# Altium PCB PCB1.PcbDoc (part 1 of 3)
Units mm, origin at the board's own origin, x right, y up, seen from the top; angles counter-clockwise.
Board outline 200 x 55 mm, 4 copper layers (Top Layer, Layer 1, Layer 2, Bottom Layer), stack 1.714 mm thick; 312 components, 230 nets, 1114 pads, 714 vias.
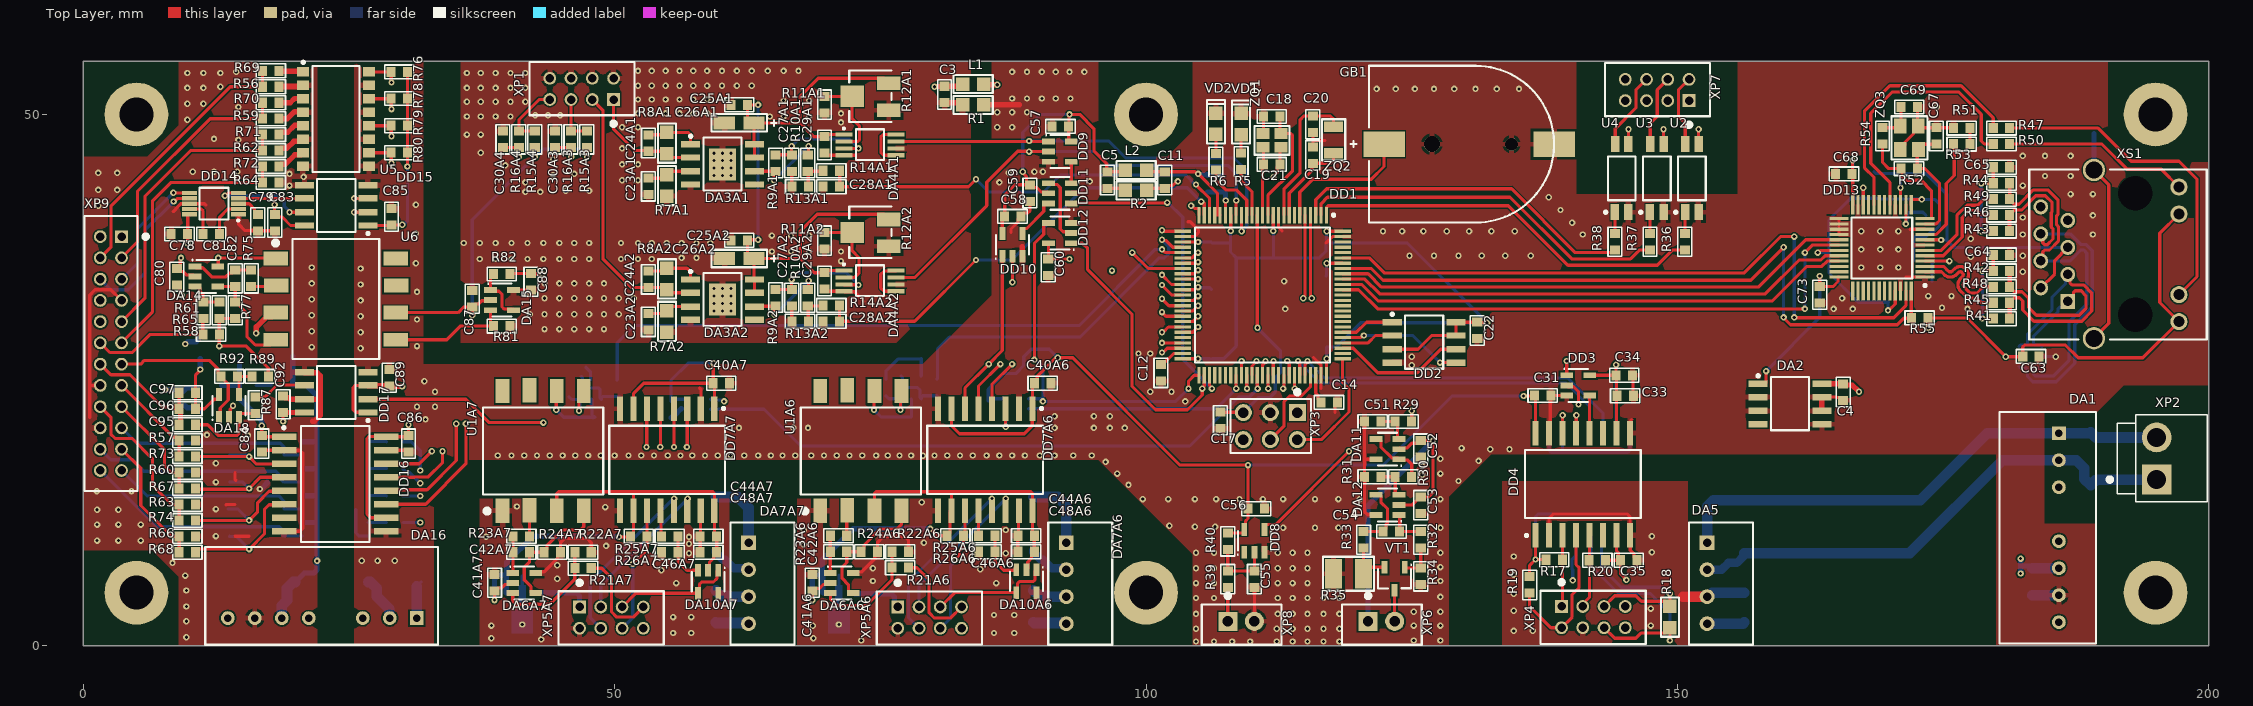
[diagram p0: Top Layer view]
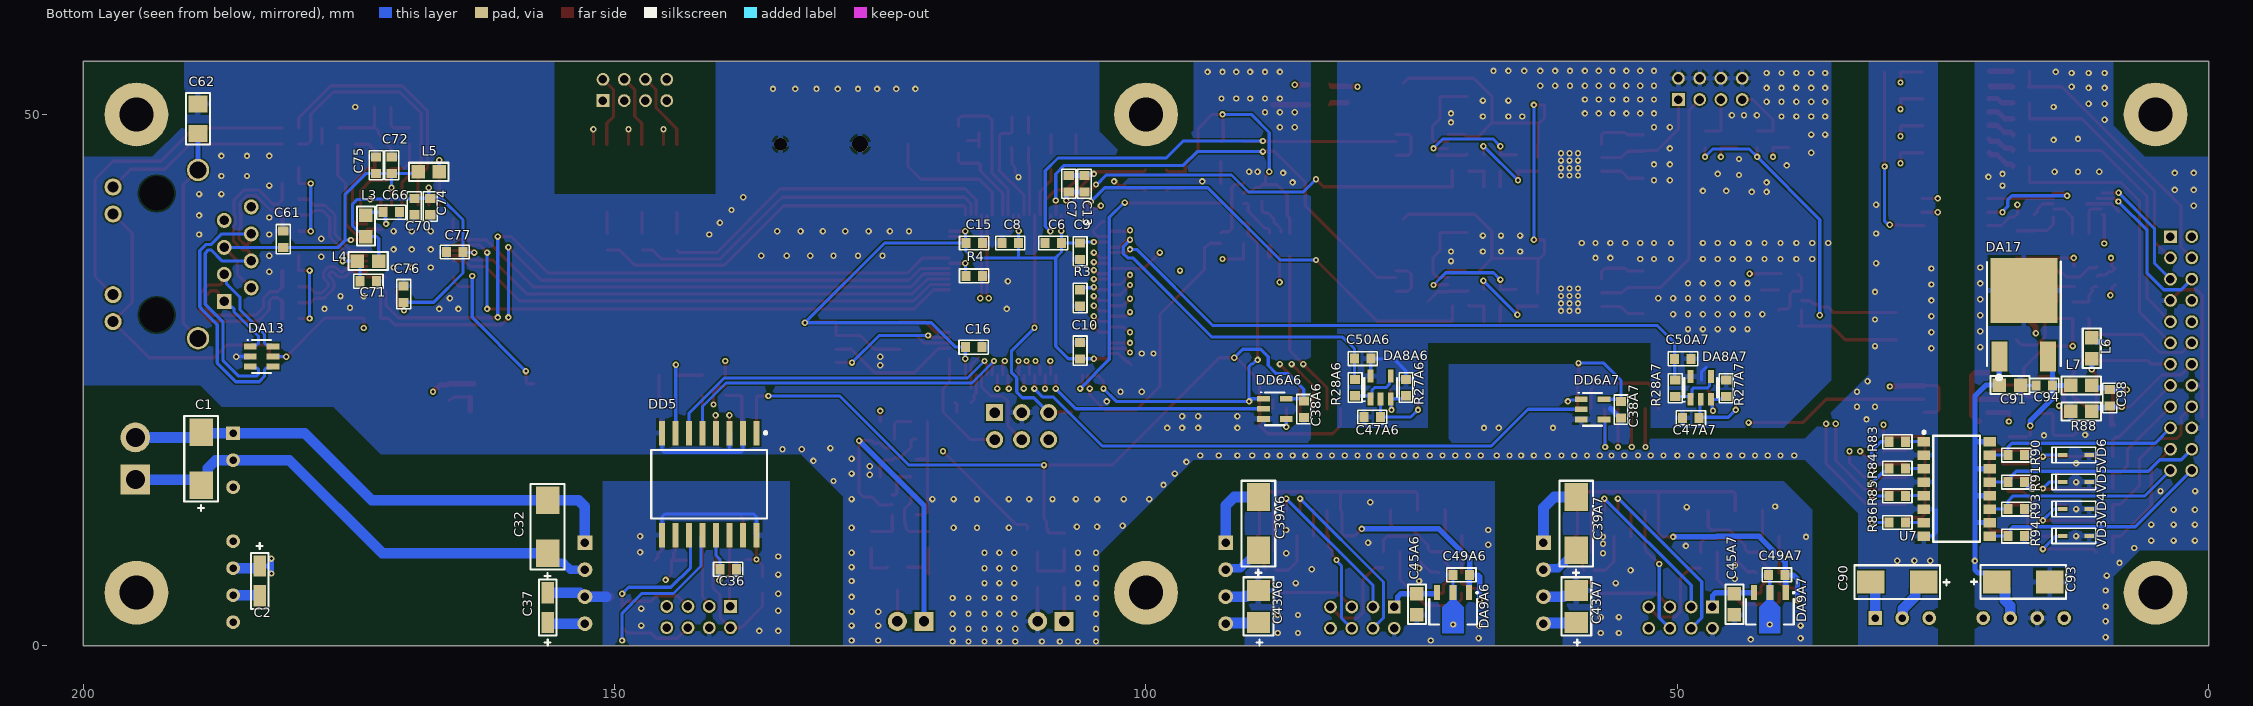
[diagram p1: Bottom Layer view, seen from below]
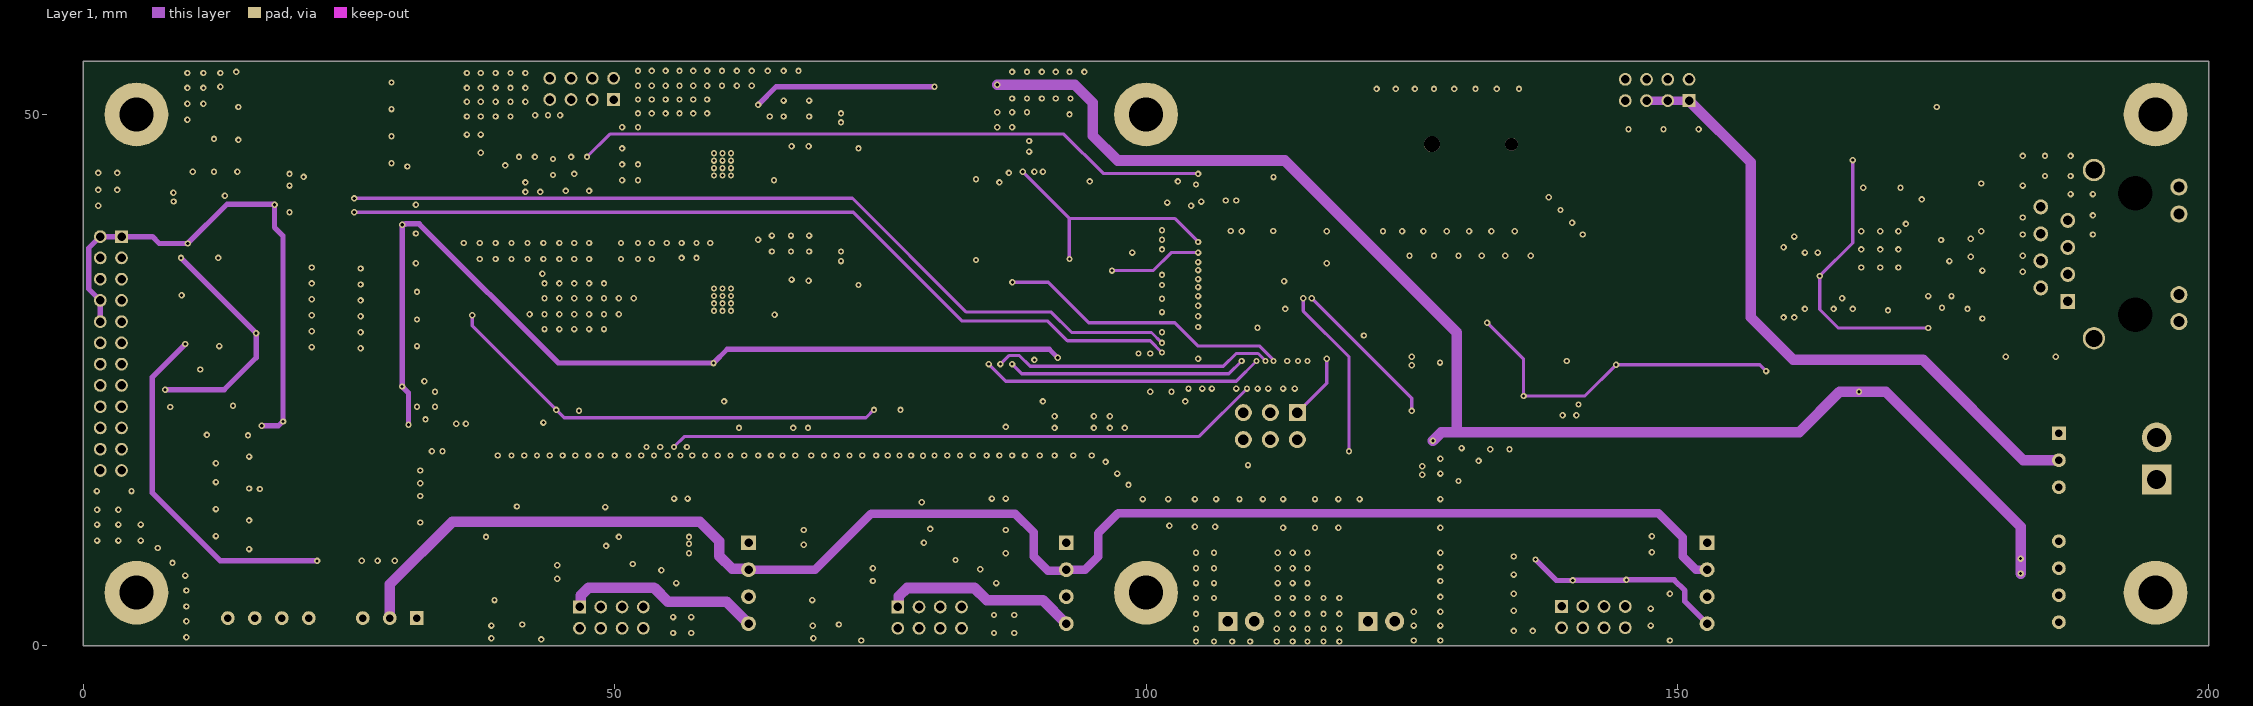
[diagram p2: Layer 1]
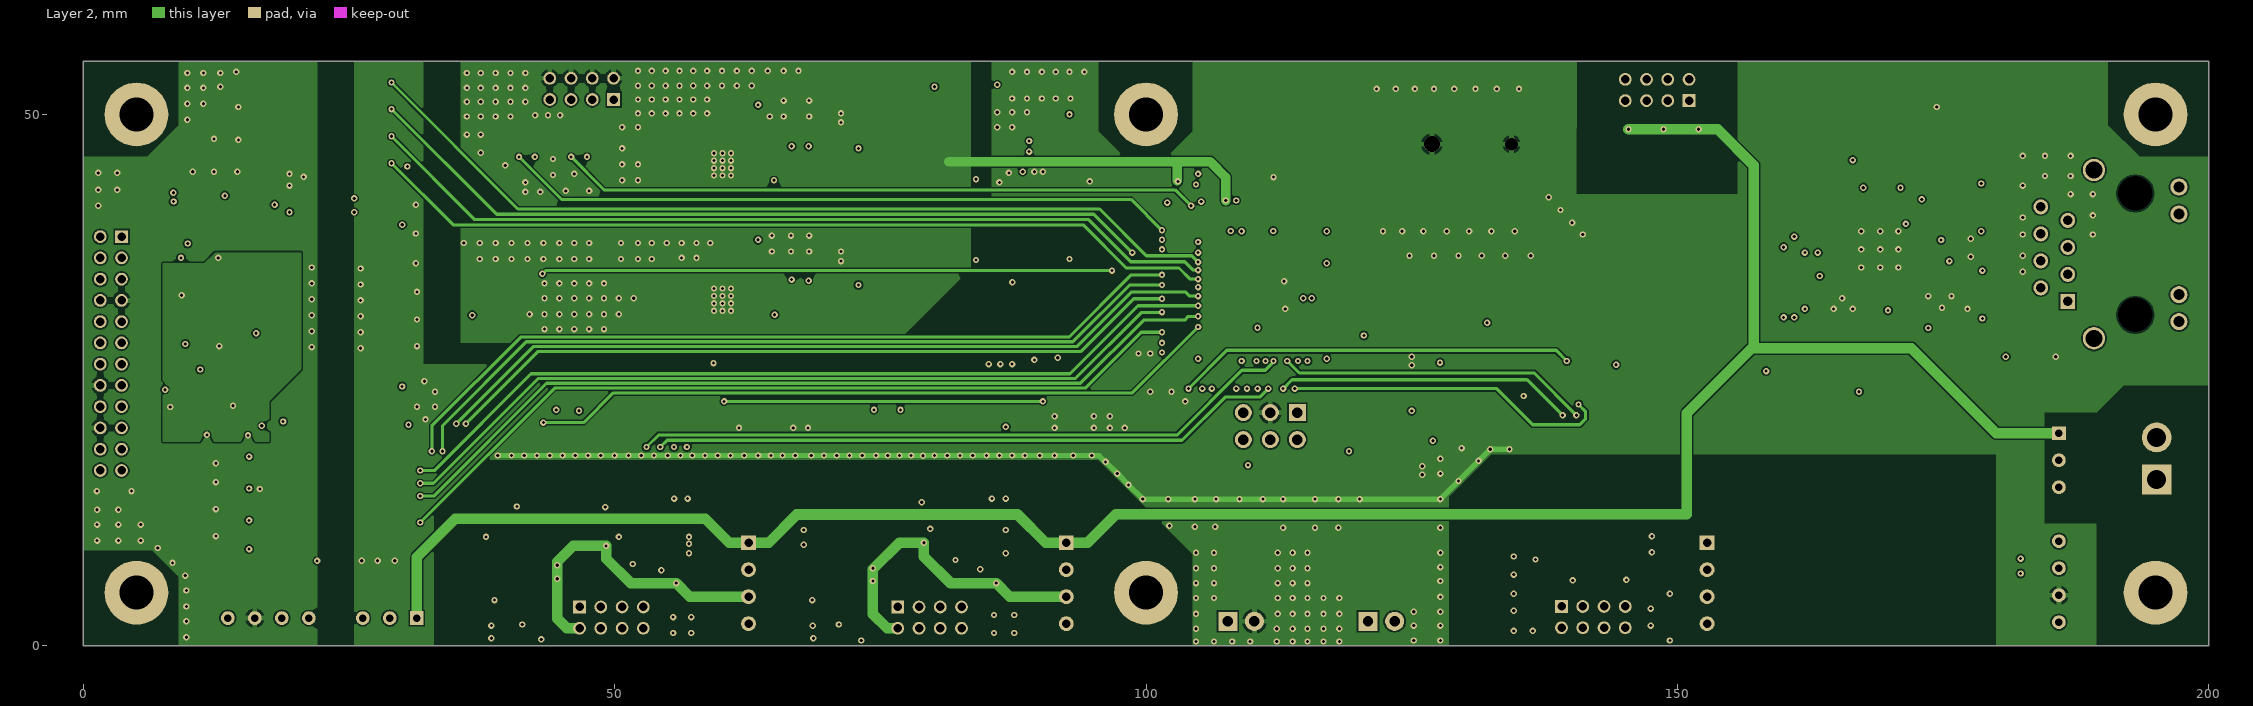
[diagram p3: Layer 2]
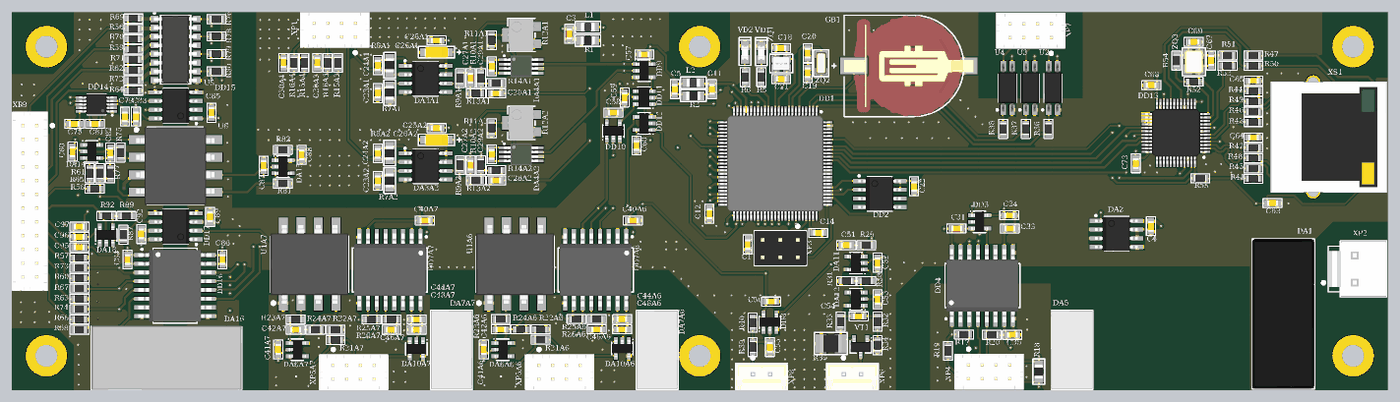
[diagram p6: 3D render of the assembled board from above, using the file's embedded part models]
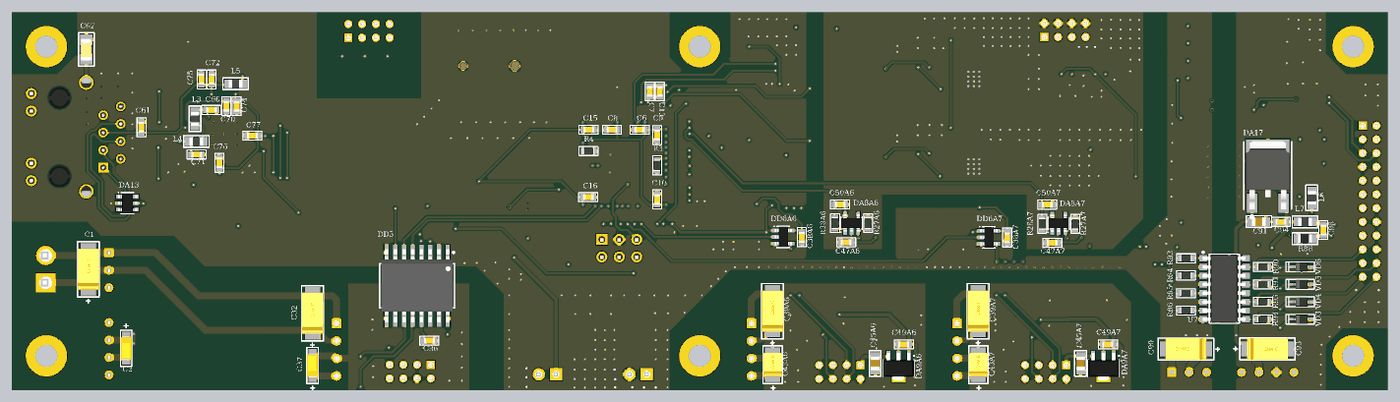
[diagram p7: 3D render of the assembled board from below, using the file's embedded part models]

## Layer stack, top to bottom
Top Solder: solder mask 0.0102, Solder Resist, Dk 3.5
Top Layer: signal copper 0.018
Dielectric 2: prepreg 0.0711, PP-006, Dk 4.1
Layer 1: signal copper 0.018
Dielectric 1: dielectric 1.5, FR-4, Dk 4.8
Layer 2: signal copper 0.018
Dielectric 3: prepreg 0.0711, PP-006, Dk 4.1
Bottom Layer: signal copper 0.018
Bottom Solder: solder mask 0.0102, Solder Resist, Dk 3.5

## Board outline
0,0 0,55 200,55 200,0

## Design rules (kind name [scope] priority, off if disabled: settings)
BoardOutlineClearance [(OnLayer('Bottom Layer') AND OnLayer('Top Layer'))] p1: gap=0.2 ignorepadtopadclearanceinfootprint=FALSE
Clearance [All] p1: gap=0.15 ignorepadtopadclearanceinfootprint=TRUE
DiffPairsRouting [All] p1: maxlimit=0.254 minlimit=0.2 mostfreqgap=0.254 toplayer_minwidth=0.3 toplayer_maxwidth=0.381 toplayer_prefwidth=0.381 midlayer1_minwidth=0.3 midlayer1_maxwidth=0.381 midlayer1_prefwidth=0.381 midlayer2_minwidth=0.3 midlayer2_maxwidth=0.381 midlayer2_prefwidth=0.381 bottomlayer_minwidth=0.3 bottomlayer_maxwidth=0.381 bottomlayer_prefwidth=0.381 maxuncoupledlength=12.7
Height [(OnLayer('Bottom Layer'))] p1: minheight=0 maxheight=3 prefheight=3
HoleSize [All] p1: absolutevalues=TRUE maxlimit=10 minlimit=0.2 maxpercent=80.000 minpercent=20.000
MinimumSolderMaskSliver [All] p1: minsoldermaskwidth=0.04
PlaneClearance [All] p1: clearance=0.5
PlaneConnect [All] p1: planeconnectstyle=Relief reliefexpansion=0.5 reliefentries=4 reliefconductorwidth=0.25 reliefairgap=0.25
PolygonConnect [All] p1: thpad.connectstyle=Relief thpad.reliefconductorwidth=0.5 thpad.reliefentries=4 thpad.polygonreliefangle="90 Angle" thpad.airgapwidth=0.25 smdpad.connectstyle=Relief smdpad.reliefconductorwidth=0.5 smdpad.reliefentries=4 smdpad.polygonreliefangle="90 Angle" smdpad.airgapwidth=0.25 via.connectstyle=Direct via.reliefconductorwidth=0.254 via.reliefentries=4 via.polygonreliefangle="90 Angle" via.airgapwidth=0.152
RoutingCorners [All] p1: cornerstyle=Round minsetback=0.254 maxsetback=2.54
RoutingVias [All] p1: holewidth=0.2 width=0.5 viastyle="Through Hole" minholewidth=0.2 minwidth=0.5 maxholewidth=1 maxwidth=1
SilkToSilkClearance [All] p1: silktosilkclearance=0.1
SilkToSolderMaskClearance [IsPad] p1: minsilkscreentomaskgap=0 clearancetoexposedcopper=TRUE
SolderMaskExpansion [All] p1: expansion=0.102 istentingtop=FALSE
Width [All] p1: maxlimit=1 minlimit=0.2 preferedwidth=0.3 minimp=50.000000 maximp=50.000000 favimp=50.000000
21 further rules are at their usual default settings.

## Classes and differential pairs
component class A11: C57 C58 C59 C60 DD9 DD10 DD11 DD12
component class A10: C55 C56 DD8 R39 R40 XP8
component class Main: C1 C2 C3 C4 C5 C6 C7 C8 C9 C10 C11 C12 C13 C14 C15 C16 C17 C18 C19 C20 C21 C22 DA1 DA2 DD1 DD2 GB1 L1 L2 R1 R2 R3 R4 R5 R6 VD1 VD2 XP1 XP2 XP3 ZQ1
component class A13: C78 C79 C80 C81 C82 C83 C84 C85 C86 C87 C88 C89 C90 C91 C92 C93 C94 C95 C96 C97 C98 DA14 DA15 DA16 DA17 DA18 DD14 DD15 DD16 DD17 L6 L7 R1 R56 R57 R58 R59 R60 R61 R62 R63 R64 R65 R66 R67 R68 R69 R70 R71 R72 R73 R74 R75 R76 R78 R79 R80 R81 R82 R83 R85 R86 R87 R88 R89 R90 R91 R92 R93 R94 U2 U6 U7 VD2 VD3 VD4 VD6 XP9
component class A5: C31 C32 C33 C34 C35 C36 C37 DA5 DD1 DD3 DD4 R17 R18 R19 R20 XP4
component class A8: C51 C52 C53 C54 DA11 DA12 R29 R30 R31 R32 R33 R34 R35 VT1 XP3
differential pair class TD: TXO
differential pair class RD: RXI
channel class Thermistor: A3 A4
channel class Photodiode: A1 A2
channel class LD_driver: A6 A7
component class A12: C12 C61 C62 C63 C64 C65 C66 C67 C69 C70 C71 C72 C73 C74 C75 C76 C77 DA13 DD13 L3 L4 L5 R41 R42 R43 R44 R45 R46 R47 R48 R49 R50 R51 R52 R53 R54 R55 XS1 ZQ3
component class A9: R36 R37 R38 U2 U3 U4 XP7
component class A7: C38A7 C39A7 C40A7 C41A7 C42A7 C43A7 C44A7 C45A7 C46A7 C47A7 C48A7 C49A7 C50A7 DA6A7 DA7A7 DA9A7 DA10A7 DD6A7 DD7A7 R21A7 R22A7 R24A7 R25A7 R26A7 R27A7 R28A7 U1A7 XP5A7
component class A6: C38A6 C39A6 C41A6 C42A6 C43A6 C44A6 C45A6 C46A6 C47A6 C48A6 C49A6 C50A6 DA6A6 DA7A6 DA8A6 DA9A6 DA10A6 DD6A6 R22A6 R23A6 R24A6 R25A6 R26A6 R27A6 R28A6 U1A6 XP5A6
component class A4: C30A4 R15A4
component class A3: C30A3 R15A3
component class A2: C23A2 C24A2 C25A2 C26A2 C28A2 C29A2 DA3A2 R8A2 R9A2 R10A2 R11A2 R12A2 R13A2 R14A2
component class A1: C23A1 C24A1 C25A1 C27A1 C28A1 C29A1 DA3A1 R7A1 R8A1 R9A1 R10A1 R11A1 R12A1 R13A1
differential pair TXO: +TXO_P -TXO_N
differential pair TD: +TD_P -TD_N
differential pair RXI: +RXI_P -RXI_N
differential pair RD: +RD_P -RD_N

## Components (designator, comment, footprint, x,y, rotation, side; value= is the part's Value field where it differs from the comment)
C1 "10мкФх35B" CAP_C 188.9,15.1 r90 bottom
C2 "10мкФх10B" CAP_A 183.4,7.5 r270 bottom
C3 "0,1мкФ" CAP_0603 81.035,52.675 r270 top
C4 "0,1мкФ" CAP_0603 165.6,24.675 r270 top
C5 "2,2мкФ" CAP_0603 96.365,44.625 r270 top
C6 "0,1мкФ" CAP_0603 107.925,37.9 r0 bottom
C7 "0,1мкФ" CAP_0603 107.266,42.683 r90 bottom
C8 "0,1мкФ" CAP_0603 113.575,37.9 r180 bottom
C9 "0,1мкФ" CAP_0603 106.2,36.325 r90 bottom
C10 "0,1мкФ" CAP_0603 106.2,28.575 r270 bottom
C11 "0,1мкФ" CAP_0603 101.765,44.625 r270 top
C12 "2,2мкФ" CAP_0603 101.4,26.475 r270 top
C13 "0,1мкФ" CAP_0603 105.8,42.675 r90 bottom
C14 "2,2мкФ" CAP_0603 116.425,22.9 r0 top
C15 "0,1мкФ" CAP_0603 116.975,37.9 r180 bottom
C16 "0,1мкФ" CAP_0603 117.025,28.1 r180 bottom
C17 "0,1мкФ" CAP_0603 107,22.025 r270 top
C18 "8пФ" CAP_0603 112.625,49.8 r180 top
C19 "18пФ" CAP_0603 115.7,45.375 r90 top
C20 "18пФ" CAP_0603 115.7,49.875 r270 top
C21 "8пФ" CAP_0603 111.025,45.3 r0 top
C22 "0,1мкФ" CAP_0603 131.171,30.471 r270 top
C23A1 "0,1мкФ" CAP_0603 53.18,42.425 r90 top (schematic designator C23)
C23A2 "0,1мкФ" CAP_0603 53.179,29.678 r90 top (schematic designator C23)
C24A1 "10пФ" CAP_0603 53.18,48.11 r270 top (schematic designator C24)
C24A2 "10пФ" CAP_0603 53.179,35.278 r270 top (schematic designator C24)
C25A1 "0,1мкФ" CAP_0603 62.525,50.9 r180 top (schematic designator C25)
C25A2 "0,1мкФ" CAP_0603 62.524,38.153 r180 top (schematic designator C25)
C26A1 "10мкФх10B" CAP_A 63.125,49.2 r180 top (schematic designator C26)
C26A2 "10мкФх10B" CAP_A 63.124,36.441 r180 top (schematic designator C26)
C27A1 "10пФ" CAP_0603 66.674,46.225 r270 top (schematic designator C27)
C27A2 "10пФ" CAP_0603 66.673,33.556 r270 top (schematic designator C27)
C28A1 "0,1мкФ" CAP_0603 71.199,43.2 r180 top (schematic designator C28)
C28A2 "0,1мкФ" CAP_0603 71.198,30.531 r180 top (schematic designator C28)
C29A1 "0,1мкФ" CAP_0603 69.75,47.925 r270 top (schematic designator C29)
C29A2 "0,1мкФ" CAP_0603 69.749,35.128 r270 top (schematic designator C29)
C30A3 "0,1мкФ" CAP_0603 44.385,46.85 r90 top (schematic designator C30)
C30A4 "0,1мкФ" CAP_0603 39.485,46.85 r90 top (schematic designator C30)
C31 "0,1мкФ" CAP_0603 136.525,23.55 r0 top
C32 "10мкФх35B" CAP_C 156.3,8.7 r90 bottom
C33 "0,1мкФ" CAP_0603 144.283,23.527 r0 top
C34 "0,1мкФ" CAP_0603 144.21,25.45 r0 top
C35 "0,1мкФ" CAP_0603 144.625,8.05 r0 top
C36 "0,1мкФ" CAP_0603 140.125,7.2 r180 bottom
C37 "10мкФх10B" CAP_A 156.3,2.2 r90 bottom
C38A6 "0,1мкФ" CAP_0603 85.151,23.073 r270 bottom (schematic designator C38)
C38A7 "0,1мкФ" CAP_0603 55.3,23.025 r270 bottom (schematic designator C38)
C39A6 "10мкФх35B" CAP_C 89.41,9 r90 bottom (schematic designator C39)
C39A7 "10мкФх35B" CAP_C 59.5,9 r90 bottom (schematic designator C39)
C40A6 "0,1мкФ" CAP_0603 89.475,24.7 r0 top (schematic designator C40)
C40A7 "0,1мкФ" CAP_0603 59.225,24.7 r0 top (schematic designator C40)
C41A6 "0,1мкФ" CAP_0603 68.6,5.125 r90 top (schematic designator C41)
C41A7 "0,1мкФ" CAP_0603 38.7,5.125 r90 top (schematic designator C41)
C42A6 "100пФ" CAP_0603 70.266,8.85 r0 top (schematic designator C42)
C42A7 "100пФ" CAP_0603 40.425,8.8 r0 top (schematic designator C42)
C43A6 "10мкФх25B" CAP_B 89.41,2.2 r90 bottom (schematic designator C43)
C43A7 "10мкФх25B" CAP_B 59.5,2.2 r90 bottom (schematic designator C43)
C44A6 "0,1мкФ" CAP_0603 89.516,10.35 r180 top (schematic designator C44)
C44A7 "0,1мкФ" CAP_0603 59.625,10.3 r180 top (schematic designator C44)
C45A6 "0,33мкФ" CAP_0805 74.5,2.9 r90 bottom (schematic designator C45)
C45A7 "0,33мкФ" CAP_0805 44.625,2.9 r90 bottom (schematic designator C45)
C46A6 "1мкФ" CAP_0603 85.816,8.85 r180 top (schematic designator C46)
C46A7 "1мкФ" CAP_0603 55.975,8.8 r180 top (schematic designator C46)
C47A6 "0,1мкФ" CAP_0603 77.902,21.526 r0 bottom (schematic designator C47)
C47A7 "0,1мкФ" CAP_0603 47.929,21.45 r0 bottom (schematic designator C47)
C48A6 "0,1мкФ" CAP_0603 89.516,8.85 r180 top (schematic designator C48)
C48A7 "0,1мкФ" CAP_0603 59.625,8.8 r180 top (schematic designator C48)
C49A6 "0,1мкФ" CAP_0603 69.525,6.667 r0 bottom (schematic designator C49)
C49A7 "0,1мкФ" CAP_0603 39.833,6.667 r0 bottom (schematic designator C49)
C50A6 "0,1мкФ" CAP_0603 80.402,27.026 r180 bottom (schematic designator C50)
C50A7 "0,1мкФ" CAP_0603 50.275,27 r180 bottom (schematic designator C50)
C51 "1мкФ" CAP_0603 122.125,21.1 r180 top
C52 "0,1мкФ" CAP_0603 125.85,19.35 r270 top
C53 "0,1мкФ" CAP_0603 125.85,14.032 r270 top
C54 "100пФ" CAP_0603 123.896,10.757 r180 top
C55 "1мкФ" CAP_0603 110.2,7.075 r270 top
C56 "0,1мкФ" CAP_0603 109.575,12.9 r0 top
C57 "0,1мкФ" CAP_0603 92.75,48.875 r180 top
C58 "0,1мкФ" CAP_0603 86.643,40.4 r0 top
C59 "0,1мкФ" CAP_0603 89.075,43.4 r270 top
C60 "0,1мкФ" CAP_0603 90.8,36.425 r270 top
C61 "0,1мкФ" CAP_0603 181.179,37.462 r90 bottom
C62 "1нФх2кВ" CAP_1206 189.2,48.2 r90 bottom
C63 "0,1мкФ" CAP_0603 182.475,27.225 r0 top
C64 "0,1мкФ" CAP_0603 179.7,36.778 r0 top
C65 "0,1мкФ" CAP_0603 179.7,45.025 r0 top
C66 "0,1мкФ" CAP_0603 171.825,40.8 r180 bottom
C67 "8пФ" CAP_0603 174.375,47.175 r90 top
C68 "0,1мкФ" CAP_0603 166.475,44.4 r180 top
C69 "8пФ" CAP_0603 171.025,50.7 r0 top
C70 "0,1мкФ" CAP_0603 168.85,42.135 r270 bottom
C71 "0,1мкФ" CAP_0603 173.975,34.3 r180 bottom
C72 "0,1мкФ" CAP_0603 170.975,44.425 r90 bottom
C73 "0,1мкФ" CAP_0603 163.4,33.825 r270 top
C74 "0,1мкФ" CAP_0603 167.35,42.135 r270 bottom
C75 "0,1мкФ" CAP_0603 172.442,44.425 r90 bottom
C76 "0,1мкФ" CAP_0603 169.85,32.295 r90 bottom
C77 "0,1мкФ" CAP_0603 164.245,37.05 r0 bottom
C78 "0,1мкФ" CAP_0603 9.85,38.75 r180 top
C79 "0,1мкФ" CAP_0603 16.425,40.625 r270 top
C80 "0,1мкФ" CAP_0603 8.8,35.525 r270 top
C81 "0,1мкФ" CAP_0603 11.25,38.75 r0 top
C82 "100пФ" CAP_0603 14.3,35.375 r270 top
C83 "0,1мкФ" CAP_0603 18.025,40.625 r270 top
C84 "0,1мкФ" CAP_0603 16.8,19.825 r270 top
C85 "0,1мкФ" CAP_0603 29,39.575 r90 top
C86 "0,1мкФ" CAP_0603 30.6,19.825 r270 top
C87 "0,1мкФ" CAP_0603 36.6,31.854 r90 top
C88 "0,1мкФ" CAP_0603 42.124,35.054 r270 top
C89 "0,1мкФ" CAP_0603 28.8,24.425 r90 top
C90 "10мкФх35B" CAP_C 26.8,6 r0 bottom
C91 "0,33мкФ" CAP_0805 17.7,24.535 r0 bottom
C92 "0,1мкФ" CAP_0603 18.8,21.925 r90 top
C93 "10мкФх35B" CAP_C 19.959,6 r180 bottom
C94 "0,1мкФ" CAP_0603 14.675,24.5 r0 bottom
C95 "1мкФ" CAP_0603 10.6,20.8 r180 top
C96 "0,1мкФ" CAP_0603 10.6,22.3 r180 top
C97 "0,1мкФ" CAP_0603 10.599,23.807 r180 top
C98 "0,1мкФ" CAP_0603 9.315,24.12 r270 bottom
DA1 "TMR 3-2411" "TMR3 (SIP-8)" 185.9,20 r270 top
DA2 "KF33BD-TR" SOIC-8 157.6,24.65 r0 top
DA3A1 "ADA4817-1ARDZ" "SOIC-8 EPAD" 57.15,47.2 r0 top (schematic designator DA3)
DA3A2 "ADA4817-1ARDZ" "SOIC-8 EPAD" 57.149,34.466 r0 top (schematic designator DA3)
DA4A1 "AD8611ARM-REEL" MSOP-8 71.574,48.1 r0 top (schematic designator DA4)
DA4A2 "AD8611ARM-REEL" MSOP-8 71.573,35.306 r0 top (schematic designator DA4)
DA5 "TME 2405S" "TME (SIP-4)" 152.8,9.7 r270 top
DA6A6 "LMC7101BIM5" SOT-23-5 70.3,6.85 r0 top (schematic designator DA6)
DA6A7 "LMC7101BIM5" SOT-23-5 40.416,6.85 r0 top (schematic designator DA6)
DA7A6 "TME 2412S" "TME (SIP-4)" 92.5,9.7 r270 top (schematic designator DA7)
DA7A7 "TME 2412S" "TME (SIP-4)" 62.6,9.7 r270 top (schematic designator DA7)
DA8A6 "LMC7101BIM5" SOT-23-5 78.868,23.225 r90 bottom (schematic designator DA8)
DA8A7 "LMC7101BIM5" SOT-23-5 48.75,23.2 r90 bottom (schematic designator DA8)
DA9A6 "L78L05ABUTR" SOT-89 69.6,5 r0 bottom (schematic designator DA9)
DA9A7 "L78L05ABUTR" SOT-89 39.8,5 r0 bottom (schematic designator DA9)
DA10A6 "LMC7101BIM5" SOT-23-5 89.691,7.15 r270 top (schematic designator DA10)
DA10A7 "LMC7101BIM5" SOT-23-5 59.75,7.1 r270 top (schematic designator DA10)
DA11 "LMC7101BIM5" SOT-23-5 123.8,17.55 r180 top
DA12 "LMC7101BIM5" SOT-23-5 123.8,12.307 r180 top
DA13 "TPD4S009DBVR" SOT-23-6 184.3,28.175 r180 bottom
DA14 "LMC7101BIM5" SOT-23-5 10.502,35.7 r0 top
DA15 "LMC7101BIM5" SOT-23-5 38.324,33.479 r0 top
DA16 "TMR 4-2415" "TMR4 (SIP-8)" 31.38,2.6 r180 top
DA17 "L78M05CDT-TR" TO-252 19.7,27.229 r180 bottom
DA18 "LM7301IM5X/NOPB" SOT-23-5 12.758,21.5 r90 top
DD1 "STM32F405VGT6" LQFP-100 117,40.525 r270 top
DD2 "W25Q16JVSNIQ" SOIC-8 123.171,30.446 r0 top
DD3 "SN74LVC1G00DBV" SOT-23-5 139.6,25.45 r0 top
DD4 "ADUM1301CRW" SOIC-16W 136.65,10.41 r90 top
DD5 "ADM3054BRWZ" SOIC-16W 136.65,20.01 r270 bottom
DD6A6 "SN74LVC1G08DBV" SOT-23-5 88.951,23.248 r180 bottom (schematic designator DD6)
DD6A7 "SN74LVC1G08DBV" SOT-23-5 59.05,23.2 r180 bottom (schematic designator DD6)
DD7A6 "ADUM1401CRW" SOIC-16W 89.321,22.3 r270 top (schematic designator DD7)
DD7A7 "ADUM1401CRW" SOIC-16W 59.39,22.3 r270 top (schematic designator DD7)
DD8 "SN74LVC1G17DBV" SOT-23-5 109.25,8.8 r90 top
DD9 "SN74LVC1G08DBV" SOT-23-5 90.825,47.45 r0 top
DD10 "SN74LVC1G08DBV" SOT-23-5 86.481,36.652 r90 top
DD11 "SN74LVC1G10DBV" SOT-23-6 92.975,41.628 r180 top
DD12 "SN74LVC1G79DBV" SOT-23-5 92.974,37.883 r180 top
DD13 "W5100S-L" LQFP-48 173.3,34.7 r180 top
DD14 "ADM101EARM" MSOP-10 14.575,40.6 r180 top
DD15 "ADUM1201CR" SOIC-8 26.8,39.55 r180 top
DD16 "ADUM1400CRW" SOIC-16W 18.9,19.67 r0 top
DD17 "ADUM1100BR" SOIC-8 26.8,21.95 r180 top
GB1 "DS1092-12-N8S" DS1092-12-N8S 138.4,47.2 r180 top
L1 "BLM21PG221SN1D" IND_0805 84.735,52.85 r180 top
L2 "BLM21PG221SN1D" IND_0805 98.065,44.75 r0 top
L3 "BLM21PG221SN1D" IND_0805 173.4,40.5 r270 bottom
L4 "BLM21PG221SN1D" IND_0805 172.2,36.2 r0 bottom
L5 "BLM21PG221SN1D" IND_0805 166.5,44.6 r0 bottom
L6 "BLM21PG221SN1D" IND_0805 11.006,29 r270 bottom
L7 "BLM21PG221SN1D" IND_0805 13,24.5 r180 bottom
R1 "0" RES_0805 84.735,50.9 r180 top
R2 "0" RES_0805 98.065,42.85 r0 top
R3 "10к" RES_0603 106.2,33.525 r270 bottom
R4 "10к" RES_0603 116.975,34.8 r180 bottom
R5 "200" RES_0603 108.95,44.775 r90 top
R6 "200" RES_0603 106.582,44.752 r90 top
R7A1 "1М" RES_0805 54.915,44.3 r270 top (schematic designator R7)
R7A2 "1М" RES_0805 54.914,31.518 r270 top (schematic designator R7)
R8A1 "1М" RES_0805 54.915,48.3 r270 top (schematic designator R8)
R8A2 "1М" RES_0805 54.914,35.518 r270 top (schematic designator R8)
R9A1 "10к" RES_0603 65.15,44.625 r90 top (schematic designator R9)
R9A2 "10к" RES_0603 65.149,31.966 r90 top (schematic designator R9)
R10A1 "5,1к" RES_0603 68.174,46.225 r270 top (schematic designator R10)
R10A2 "5,1к" RES_0603 68.173,33.556 r270 top (schematic designator R10)
R11A1 "10к" RES_0603 69.747,50.125 r90 top (schematic designator R11)
R11A2 "10к" RES_0603 69.747,37.325 r90 top (schematic designator R11)
R12A1 "200к" 3224W 75.797,50.4 r0 top (schematic designator R12)
R12A2 "200к" 3224W 75.797,37.6 r0 top (schematic designator R12)
R13A1 "10к" RES_0603 68.249,43.2 r180 top (schematic designator R13)
R13A2 "10к" RES_0603 68.248,30.531 r180 top (schematic designator R13)
R14A1 "10к" RES_0603 69.599,44.7 r0 top (schematic designator R14)
R14A2 "10к" RES_0603 69.598,32.031 r0 top (schematic designator R14)
R15A3 "10к" RES_0603 47.385,46.85 r90 top (schematic designator R15)
R15A4 "10к" RES_0603 42.485,46.85 r90 top (schematic designator R15)
R16A3 "10к" RES_0603 45.885,48.45 r270 top (schematic designator R16)
R16A4 "10к" RES_0603 40.985,48.45 r270 top (schematic designator R16)
R17 "10к" RES_0603 137.615,8.098 r0 top
R18 "120" RES_0805 149.3,3.7 r270 top
R19 "10к" RES_0603 136.1,6.525 r270 top
R20 "10к" RES_0603 143.272,8.05 r180 top
R21A6 "5,1к" RES_0603 77.666,7.35 r180 top (schematic designator R21)
R21A7 "5,1к" RES_0603 47.825,7.3 r180 top (schematic designator R21)
R22A6 "10к" RES_0603 76.066,8.85 r0 top (schematic designator R22)
R22A7 "10к" RES_0603 46.225,8.8 r0 top (schematic designator R22)
R23A6 "330" RES_0603 70.266,10.35 r0 top (schematic designator R23)
R23A7 "330" RES_0603 40.425,10.3 r0 top (schematic designator R23)
R24A6 "150к" RES_0603 73.166,8.85 r0 top (schematic designator R24)
R24A7 "150к" RES_0603 43.325,8.8 r0 top (schematic designator R24)
R25A6 "10к" RES_0603 82.866,10.35 r180 top (schematic designator R25)
R25A7 "10к" RES_0603 53.075,10.3 r180 top (schematic designator R25)
R26A6 "10к" RES_0603 84.216,10.35 r0 top (schematic designator R26)
R26A7 "10к" RES_0603 54.375,10.3 r0 top (schematic designator R26)
R27A6 "150к" RES_0603 75.527,23.501 r90 bottom (schematic designator R27)
R27A7 "150к" RES_0603 45.4,23.425 r90 bottom (schematic designator R27)
R28A6 "10к" RES_0603 80.327,23.501 r90 bottom (schematic designator R28)
R28A7 "10к" RES_0603 50.2,23.425 r90 bottom (schematic designator R28)
R29 "10к" RES_0603 125.025,21.1 r180 top
R30 "22к" RES_0603 125.025,15.9 r180 top
R31 "10к" RES_0603 122.125,15.9 r180 top
R32 "200" RES_0603 125.85,10.782 r270 top
R33 "10к" RES_0603 120.471,10.782 r270 top
R34 "10к" RES_0603 125.85,5.732 r90 top
R35 "10" RES_1210 117.671,6.757 r0 top
R36 "200" RES_0603 150.7,38.825 r270 top
R37 "200" RES_0603 147.425,38.825 r270 top
R38 "200" RES_0603 144.125,38.825 r270 top
R39 "1к" RES_0603 107.7,5.475 r90 top
R40 "10к" RES_0603 107.7,9.025 r90 top
R41 "49,9" RES_0603 181.3,30.778 r180 top
R42 "49,9" RES_0603 181.3,35.278 r180 top
R43 "49,9" RES_0603 181.3,39.025 r180 top
R44 "49,9" RES_0603 181.3,43.525 r180 top
R45 "3,3" RES_0603 179.7,32.277 r0 top
R46 "3,3" RES_0603 179.7,40.525 r0 top
R47 "1к" RES_0603 181.3,48.712 r180 top
R48 "3,3" RES_0603 179.7,33.778 r0 top
R49 "3,3" RES_0603 179.7,42.025 r0 top
R50 "1к" RES_0603 181.3,47.212 r180 top
R51 "300" RES_0603 175.95,48.712 r0 top
R52 "1М" RES_0603 172.6,44.9 r180 top
R53 "12к" RES_0603 177.55,47.212 r180 top
R54 "0" RES_0603 169.3,47.175 r90 top
R55 "10к" RES_0603 171.995,30.85 r0 top
R56 "10к" RES_0603 18.45,52.6 r180 top
R57 "10к" RES_0603 10.6,19.3 r180 top
R58 "10к" RES_0603 11.225,29.3 r0 top
R59 "10к" RES_0603 18.45,49.6 r180 top
R60 "10к" RES_0603 10.6,16.3 r180 top
R61 "20к" RES_0603 11.3,30.775 r90 top
R62 "10к" RES_0603 18.45,46.6 r180 top
R63 "10к" RES_0603 10.6,13.3 r180 top
R64 "10к" RES_0603 18.45,43.6 r180 top
R65 "10к" RES_0603 12.8,32.375 r270 top
R66 "10к" RES_0603 10.6,10.3 r180 top
R67 "10к" RES_0603 9,14.8 r0 top
R68 "10к" RES_0603 9,8.8 r0 top
R69 "390" RES_0603 16.85,54.1 r0 top
R70 "390" RES_0603 16.85,51.1 r0 top
R71 "390" RES_0603 16.85,48.1 r0 top
R72 "390" RES_0603 16.85,45.1 r0 top
R73 "10к" RES_0603 9,17.8 r0 top
R74 "10к" RES_0603 9,11.8 r0 top
R75 "330" RES_0603 15.8,35.375 r270 top
R76 "10к" RES_0603 30.525,54 r180 top
R77 "150к" RES_0603 14.3,32.375 r270 top
R78 "10к" RES_0603 30.525,51.5 r180 top
R79 "10к" RES_0603 30.525,48.94 r180 top
R80 "10к" RES_0603 30.525,46.4 r180 top
R81 "150к" RES_0603 38.575,30.079 r0 top
R82 "10к" RES_0603 38.575,34.979 r0 top
R83 "200" RES_0603 28.5,19.2 r0 bottom
R84 "200" RES_0603 28.5,16.7 r0 bottom
R85 "200" RES_0603 28.5,14.1 r0 bottom
R86 "200" RES_0603 28.5,11.6 r0 bottom
R87 "10к" RES_0603 16.2,23.425 r270 top
R88 "0" RES_0805 13,22.05 r180 bottom
R89 "10к" RES_0603 17.433,25.345 r180 top
R90 "10к" RES_0603 17.3,17.94 r0 bottom
R91 "10к" RES_0603 17.3,15.4 r0 bottom
R92 "6,04к" RES_0603 14.53,25.35 r180 top
R93 "10к" RES_0603 17.3,12.86 r0 bottom
R94 "10к" RES_0603 17.3,10.32 r0 bottom
U1A6 "HCNR-200-500E" HCNR200 69.341,12.7 r90 top (schematic designator U1)
U1A7 "HCNR-200-500E" HCNR200 39.45,12.7 r90 top (schematic designator U1)
U2 "TLP291(GB-TP,SE" 11-3C1 150.725,40.8 r90 top
U3 "TLP291(GB-TP,SE" 11-3C1 147.425,40.8 r90 top
U4 "TLP291(GB-TP,SE" 11-3C1 144.125,40.8 r90 top
U5 "TLP281-4" SOP-16 20.68,54.02 r0 top
U6 "HCNR-200-500E" HCNR200 18.124,36.45 r0 top
U7 "TLP281-4" SOP-16 26.82,19.21 r180 bottom
VD1 "KP-2012MGC" LED_0805 108.95,48.1 r90 top
VD2 "KP-2012EC" LED_0805 106.582,48.127 r90 top
VD3 "BZX384-C5V1" SOD-323 13.725,10.32 r180 bottom
VD4 "BZX384-C5V1" SOD-323 13.725,12.86 r180 bottom
VD5 "BZX384-C5V1" SOD-323 13.725,15.4 r180 bottom
VD6 "BZX384-C5V1" SOD-323 13.725,17.94 r180 bottom
VT1 "AO3400A" SOT-23-3 124.346,7.382 r270 top
XP1 "B8B-PHDSS" B8B-PHDSS 49.9,51.4 r0 top
XP2 "B2P-VH" B2P-VH 195.1,15.64 r90 top
XP3 "PLD-6" PLD-6 114.24,21.94 r180 top
XP4 "B8B-PHDSS" B8B-PHDSS 139.1,3.7 r180 top
XP5A6 "B8B-PHDSS" B8B-PHDSS 76.641,3.65 r180 top (schematic designator XP5)
XP5A7 "B8B-PHDSS" B8B-PHDSS 46.7,3.65 r180 top (schematic designator XP5)
XP6 "B2B-EH-A" B2B-EH-A 120.896,2.3 r0 top
XP7 "B8B-PHDSS" B8B-PHDSS 151.1,51.3 r0 top
XP8 "B2B-EH-A" B2B-EH-A 107.7,2.3 r0 top
XP9 "B24B-PHDSS" B24B-PHDSS 3.6,38.5 r90 top locked
XS1 "LPJD0012BENL" LPJD0012BENL 186.74,32.407 r90 top
ZQ1 "16МГц" NX2520SA 112.7,48.2 r180 top
ZQ2 "32,768кГц" NX3215SA 117.65,46.35 r90 top
ZQ3 "25МГц" 7M 172.7,46.7 r90 top

## Footprints (in the part's own frame and the unit in brackets; to place one, negate y for a bottom-side part, rotate by r counter-clockwise, add the part's x,y. Pads: shape width x height; smd on the part's side, far side on the other; paste and mask are expansions set on the pad)
7M [mm]
  rect 1.4x1.2 smd: 1(0,0) 2(2.2,0.025) 3(2.2,1.725) 4(0,1.725)
  silkscreen extent -0.92,-0.82 3.13,2.55, body extent -0.55,-0.45 2.75,2.15, height 0.8
11-3C1 [mm]
  rect 1.5x0.8 smd: 1(0,0) 2(0,-1.275) 3(6.4,-1.275) 4(6.4,-0.025)
  silkscreen extent -0.12,-1.95 5.25,1, body extent -0.28,-1.95 6.73,0.65, height 2.2
3224W [mm]
  rect 2.2x1.3 smd: 1(0,0) 3(0,2.525)
  rect 2.2x2 smd: 2(-3.45,1.3)
  silkscreen extent -3.72,-1.12 0.25,3.72, body extent -3.72,-1.12 0.23,3.71, height 5.29
B2B-EH-A [mm]
  rect 1.8x1.8 hole 0.965: 1(0,0)
  round 1.8 hole 1: 2(2.5,0)
  silkscreen extent -2.45,-2.2 5.05,2.6, body extent -2.45,-2.2 5.05,1.6, height 6
B2P-VH [mm]
  rect 2.8x2.8 hole 1.8: 1(0,0)
  round 2.8 hole 1.8: 2(3.96,0)
  silkscreen extent -2.07,-4.78 6.1,4.6, body extent -1.93,-4.75 5.93,3.75, height 10.9
B8B-PHDSS [mm]
  rect 1.2x1.2 hole 0.8: 1(0,0)
  round 1.2 hole 0.8: 2(0,2) 3(-2,0) 4(-2,2) 5(-4,0) 6(-4,2) 7(-6,0) 8(-6,2)
  silkscreen extent -7.93,-2.47 1.97,3.52, body extent -7.93,-1.48 1.97,3.52, height 6.5
B24B-PHDSS [mm]
  rect 1.2x1.2 hole 0.8: 1(0,0)
  round 1.2 hole 0.8: 2(0,2) 3(-2,0) 4(-2,2) 5(-4,0) 6(-4,2) 7(-6,0) 8(-6,2) 9(-8,0) 10(-8,2) 11(-10,0) 12(-10,2) 13(-12,0) 14(-12,2) 15(-14,0) 16(-14,2) 17(-16,0) 18(-16,2) 19(-18,0) 20(-18,2) 21(-20,0) 22(-20,2) 23(-22,0) 24(-22,2)
  silkscreen extent -23.95,-2.47 1.95,3.5, body extent -23.95,-1.5 1.95,3.5, height 6.5
CAP_0603 [mm]
  rect 0.85x0.95 smd: 1(0.025,0) 2(1.575,0)
  silkscreen extent -0.58,-0.65 2.17,0.65, body extent 0.02,-0.43 1.63,0.44, height 0.8
CAP_0805 [mm]
  rect 1.27x1.27 smd: 1(0,0) 2(2,0)
  silkscreen extent -0.85,-0.85 2.85,0.85, body extent 0,-0.62 2,0.63, height 1
CAP_1206 [mm]
  rect 1.6x1.8 smd: 1(0,0) 2(2.8,0)
  silkscreen extent -1.02,-1.12 3.83,1.12, body extent -0.25,-0.77 2.95,0.83, height 0.94
CAP_A [mm]
  rect 2x1.2 smd: 1(0,0) 2(2.8,0)
  silkscreen extent -2.15,-0.82 4.03,0.82, body extent -0.33,-0.8 3.13,0.8, height 1.65
CAP_B [mm]
  rect 2x2.2 smd: 1(0,0) 2(3,0)
  silkscreen extent -2.15,-1.4 4.25,1.4, body extent -0.25,-1.4 3.25,1.4, height 1.9
CAP_C [mm]
  rect 2.6x2.2 smd: 1(0,0) 2(5,0)
  silkscreen extent -2.4,-1.58 6.53,1.6, body extent -0.5,-1.6 5.5,1.6, height 2.5
DS1092-12-N8S [mm]
  rect 3.9x2.4 smd: 1(0,0) 2(16,0)
  round 1.2 hole 1.2: 1(4,0)
  round 1.5 hole 1.5: 1(11.5,0)
  silkscreen extent 0,-7.37 19.15,7.37, body extent -1.4,-7.37 17.4,7.37, height 4.23
HCNR200 [mm]
  rect 2.3x1.3 smd: 1(0,0) 2(0.05,-2.55) 3(0,-5.1) 4(0,-7.65) 5(11.275,-7.65) 6(11.275,-5.1) 7(11.325,-2.55) 8(11.275,0)
  silkscreen extent -0.15,-9.48 9.72,1.83, body extent -0.08,-9.47 11.33,1.83, height 5.2
IND_0805 [mm]
  rect 1.27x1.27 smd: 1(0,0) 2(2,0)
  silkscreen extent -0.85,-0.85 2.85,0.85, body extent 0,-0.62 2,0.62, height 0.85
LED_0805 [mm]
  rect 1.27x1.27 smd: 1(0,0) 2(2,0)
  silkscreen extent -0.85,-0.85 3.22,0.85, body extent -0.03,-0.46 2.03,0.45, height 0.85
LPJD0012BENL [mm]
  rect 1.4x1.4 hole 0.9: 1(0,0)
  round 1.4 hole 0.9: 2(1.27,2.54) 3(2.54,0) 4(3.81,2.54) 5(5.08,0) 6(6.35,2.54) 7(7.62,0) 8(8.89,2.54)
  round 1.6 hole 1.02: 9(-1.907,-10.46) 10(0.633,-10.46) 11(8.223,-10.46) 12(10.763,-10.46)
  round 2.1 hole 1.6: 13(-3.475,-2.46) 14(12.365,-2.46)
  round 0 hole 3.25 unplated: ""(-1.27,-6.35) ""(10.16,-6.35)
  silkscreen extent -3.57,-13.08 12.42,3.62, body extent -3.57,-13.08 12.42,3.63, height 17.4
LQFP-48 [mm]
  rect 1.8x0.3 smd: 1(0,0) 2(0,-0.5) 3(0,-1) 4(0,-1.5) 5(0,-2) 6(0,-2.5) 7(0,-3) 8(0,-3.5) 9(0,-4) 10(0,-4.5) 11(0,-5) 12(0,-5.5) 25(8.1,-5.5) 26(8.1,-5) 27(8.1,-4.5) 28(8.1,-4) 29(8.1,-3.5) 30(8.1,-3) 31(8.1,-2.5) 32(8.1,-2) 33(8.1,-1.5) 34(8.1,-1) 35(8.1,-0.5) 36(8.1,0)
  rect 0.3x1.8 smd: 13(1.3,-6.8) 14(1.8,-6.8) 15(2.3,-6.8) 16(2.8,-6.8) 17(3.3,-6.8) 18(3.8,-6.8) 19(4.3,-6.8) 20(4.8,-6.8) 21(5.3,-6.8) 22(5.8,-6.8) 23(6.3,-6.8) 24(6.8,-6.8) 37(6.8,1.3) 38(6.3,1.3) 39(5.8,1.3) 40(5.3,1.3) 41(4.8,1.3) 42(4.3,1.3) 43(3.8,1.3) 44(3.3,1.3) 45(2.8,1.3) 46(2.3,1.3) 47(1.8,1.3) 48(1.3,1.3)
  silkscreen extent -0.13,-5.6 6.9,0.92, body extent -0.45,-7.25 8.55,1.75, height 1.6
LQFP-100 [mm]
  rect 1.55x0.3 smd: 1(0,-0.025) 2(0,-0.525) 3(0,-1.025) 4(0,-1.525) 5(0,-2.025) 6(0,-2.525) 7(0,-3.025) 8(0,-3.525) 9(0,-4.025) 10(0,-4.525) 11(0,-5.025) 12(0,-5.525) 13(0,-6.025) 14(0,-6.525) 15(0,-7.025) 16(0,-7.525) 17(0,-8.025) 18(0,-8.525) 19(0,-9.025) 20(0,-9.525) 21(0,-10.025) 22(0,-10.525) 23(0,-11.025) 24(0,-11.525) 25(0,-12.025) 51(15.05,-12.025) 52(15.05,-11.525) 53(15.05,-11.025) 54(15.05,-10.525) 55(15.05,-10.025) 56(15.05,-9.525) 57(15.05,-9.025) 58(15.05,-8.525) 59(15.05,-8.025) 60(15.05,-7.525) 61(15.05,-7.025) 62(15.05,-6.525) 63(15.05,-6.025) 64(15.05,-5.525) 65(15.05,-5.025) 66(15.05,-4.525) 67(15.05,-4.025) 68(15.05,-3.525) 69(15.05,-3.025) 70(15.05,-2.525) 71(15.05,-2.025) 72(15.05,-1.525) 73(15.05,-1.025) 74(15.05,-0.525) 75(15.05,-0.025)
  rect 0.3x1.55 smd: 26(1.525,-13.55) 27(2.025,-13.55) 28(2.525,-13.55) 29(3.025,-13.55) 30(3.525,-13.55) 31(4.025,-13.55) 32(4.525,-13.55) 33(5.025,-13.55) 34(5.525,-13.55) 35(6.025,-13.55) 36(6.525,-13.55) 37(7.025,-13.55) 38(7.525,-13.55) 39(8.025,-13.55) 40(8.525,-13.55) 41(9.025,-13.55) 42(9.525,-13.55) 43(10.025,-13.55) 44(10.525,-13.55) 45(11.025,-13.55) 46(11.525,-13.55) 47(12.025,-13.55) 48(12.525,-13.55) 49(13.025,-13.55) 50(13.525,-13.55) 76(13.525,1.5) 77(13.025,1.5) 78(12.525,1.5) 79(12.025,1.5) 80(11.525,1.5) 81(11.025,1.5) 82(10.525,1.5) 83(10.025,1.5) 84(9.525,1.5) 85(9.025,1.5) 86(8.525,1.5) 87(8.025,1.5) 88(7.525,1.5) 89(7.025,1.5) 90(6.525,1.5) 91(6.025,1.5) 92(5.525,1.5) 93(5.025,1.5) 94(4.525,1.5) 95(4.025,1.5) 96(3.525,1.5) 97(3.025,1.5) 98(2.525,1.5) 99(2.025,1.5) 100(1.525,1.5)
  silkscreen extent -0.12,-12.37 13.87,0.78, body extent -0.48,-14.03 15.53,1.98, height 1.5
MSOP-8 [mm]
  rect 1.6x0.4 smd: 1(0,0) 2(0,-0.65) 3(0,-1.3) 4(0,-1.95) 5(4.9,-1.95) 6(4.9,-1.3) 7(4.9,-0.65) 8(4.9,0)
  silkscreen extent -0.1,-2.4 3.78,0.67, body extent -0.02,-2.52 4.92,0.58, height 1.1
MSOP-10 [mm]
  rect 1.4x0.4 smd: 1(-0.025,0) 2(-0.025,-0.5) 3(-0.025,-1) 4(-0.025,-1.5) 5(-0.025,-2) 6(4.575,-2) 7(4.575,-1.5) 8(4.575,-1) 9(4.575,-0.5) 10(4.575,0)
  silkscreen extent -0.1,-2.5 3.62,0.67, body extent -0.21,-2.5 4.81,0.5, height 1.05
NX2520SA [mm]
  rect 1.2x1 smd: 1(0,0) 2(1.7,0) 3(1.7,1.3) 4(0,1.3)
  silkscreen extent -0.8,-0.7 2.5,2, body extent -0.4,-0.35 2.1,1.65, height 0.65
NX3215SA [mm]
  rect 1x1.8 smd: 1(0,0) 2(2.5,0)
  silkscreen extent -0.7,-1.1 3.2,1.1, body extent -0.35,-0.75 2.85,0.75, height 0.8
PLD-6 [mm]
  rect 1.6x1.6 hole 1: 1(0,0)
  round 1.6 hole 1: 2(0,2.54) 3(2.54,0) 4(2.54,2.54) 5(5.08,0) 6(5.08,2.54)
  silkscreen extent -1.27,-2.12 6.27,3.81, body extent -1.3,-1.2 6.32,3.8, height 8.5
RES_0603 [mm]
  rect 0.85x0.95 smd: 1(0.025,0) 2(1.575,0)
  silkscreen extent -0.58,-0.65 2.17,0.65, body extent -0.05,-0.48 1.65,0.48, height 0.6
RES_0805 [mm]
  rect 1.27x1.27 smd: 1(0,0) 2(2,0)
  silkscreen extent -0.85,-0.85 2.85,0.85, body extent 0,-0.62 2,0.62, height 0.6
RES_1210 [mm]
  rect 1.6x2.8 smd: 1(-0.025,0.025) 2(2.775,0.025)
  silkscreen extent -1.02,-1.58 3.77,1.63, body extent -0.15,-1.28 2.95,1.33, height 0.57
SOD-323 [mm]
  rect 0.9x0.4 smd: 1(-0.025,0) 2(2.475,0)
  silkscreen extent -1.02,-0.7 3.1,0.72, body extent -0.05,-0.68 2.55,0.67, height 1.1
SOIC-8 [mm]
  rect 1.8x0.6 smd: 1(0,0) 2(0,-1.25) 3(0,-2.55) 4(0,-3.8) 5(6,-3.8) 6(6,-2.55) 7(6,-1.25) 8(6,0)
  silkscreen extent -0.12,-4.38 4.8,0.87, body extent -0.13,-4.37 6.08,0.63, height 1.75
"SOIC-8 EPAD" [mm]
  rect 1.8x0.6 smd: 1(0,0) 2(0,-1.25) 3(0,-2.55) 4(0,-3.8) 5(6,-3.8) 6(6,-2.55) 7(6,-1.25) 8(6,0)
  rect 2.5x3 smd: EPAD(3,-1.9)
  silkscreen extent -0.12,-4.38 4.8,0.87, body extent -0.13,-4.37 6.08,0.63, height 1.75
SOIC-16W [mm]
  rect 2.3x0.6 smd: 1(0,0) 2(0,-1.27) 3(0,-2.54) 4(0,-3.81) 5(0,-5.08) 6(0,-6.35) 7(0,-7.62) 8(0,-8.89) 9(9.6,-8.89) 10(9.6,-7.62) 11(9.6,-6.35) 12(9.6,-5.08) 13(9.6,-3.81) 14(9.6,-2.54) 15(9.6,-1.27) 16(9.6,0)
  silkscreen extent -0.15,-9.9 8.03,1, body extent -0.51,-9.7 10.11,0.8, height 2.62
SOP-16 [mm]
  rect 1.14x0.91 smd: 1(0,0) 2(0,-1.27) 3(0,-2.54) 4(0,-3.81) 5(0,-5.08) 6(0,-6.35) 7(0,-7.62) 8(0,-8.89) 9(6.22,-8.89) 10(6.22,-7.62) 11(6.22,-6.35) 12(6.22,-5.08) 13(6.22,-3.81) 14(6.22,-2.54) 15(6.22,-1.27) 16(6.22,0)
  silkscreen extent -0.1,-9.43 5.3,1, body extent -0.07,-9.44 6.17,0.54, height 1.58
SOT-23-3 [mm]
  rect 1.2x0.55 smd: 1(0,0) 2(0,-1.9) 3(2.15,-0.95)
  silkscreen extent -0.27,-2.5 2,0.65, body extent -0.15,-2.45 2.35,0.55, height 1
SOT-23-5 [mm]
  rect 1.2x0.55 smd: 1(0,0) 2(0,-0.95) 3(0,-1.9) 4(2.15,-1.9) 5(2.15,0)
  silkscreen extent -0.27,-2.5 1.97,0.65, body extent -0.15,-2.45 2.35,0.55, height 1.1
SOT-23-6 [mm]
  rect 1.2x0.55 smd: 1(0,0) 2(0,-0.95) 3(0,-1.9) 4(2.15,-1.9) 5(2.15,-0.95) 6(2.15,0)
  silkscreen extent -0.28,-2.5 1.97,0.65, body extent -0.3,-2.4 2.5,0.5, height 1.18
SOT-89 [mm]
  rect 0.57x1.4 smd: 1(0,0) 3(3,0)
  rect 0.65x1.4 smd: 2(1.5,0)
  Top Layer region: 1.825,0.7 2.5,1.375 2.5,3.825 0.5,3.825 0.5,1.375 1.175,0.7 1.175,-0.7 1.825,-0.7
  Top Layer lines w0.2: 1.5,0 1.5,-0.075
  silkscreen extent -0.82,-0.07 3.75,3, body extent -0.75,-0.42 3.75,3.58, height 1.5
"TME (SIP-4)" [mm]
  rect 1.4x1.4 hole 0.8: 1(0,0)
  round 1.4 hole 0.8: 2(2.54,0) 3(5.08,0) 4(7.62,0)
  silkscreen extent -1.9,-1.7 9.6,4.33, body extent -1.9,-1.7 9.5,4.3, height 10.2
"TMR3 (SIP-8)" [mm]
  rect 1.3x1.3 hole 0.7: 1(0,0)
  round 1.3 hole 0.7: 2(2.54,0) 3(5.08,0) 5(10.16,0) 6(12.7,0) 7(15.24,0) 8(17.78,0)
  silkscreen extent -2,-5.58 19.8,3.5, body extent -2,-5.6 19.8,3.5, height 11.2
"TMR4 (SIP-8)" [mm]
  rect 1.3x1.3 hole 0.7: 1(0,0)
  round 1.3 hole 0.7: 2(2.54,0) 3(5.08,0) 5(10.16,0) 6(12.7,0) 7(15.24,0) 8(17.78,0)
  silkscreen extent -2,-6.7 19.9,2.5, body extent -2,-6.75 19.8,2.55, height 11.4
TO-252 [mm]
  rect 1.5x2.8 smd: 1(0,0) 3(4.575,0)
  rect 6.3x6.1 smd: 2(2.3,6.2)
  silkscreen extent -1.17,-2.12 5.77,8.93, body extent -0.97,-0.94 5.57,9, height 2.44

## Part data
C1 C2 C26A1 C26A2 C32 C37 C39A6 C39A7 C43A6 C43A7 C90 C93: library part Capacitor_Polar
  C1 C32 C39A6 C39A7 C90 C93: Model="TECAP, 10 мкФ, 35 В, тип C, 10%"
  C2 C26A1 C26A2 C37: Model="TECAP, 10 мкФ, 10 В, тип A, 10%"
  C43A6 C43A7: Model="TECAP, 10 мкФ, 25 В, тип B, 10%"
C3 C4 C5 C6 C7 C8 C9 C10 C11 C12 C13 C14 C15 C16 C17 C19 C20 C22 C23A1 C23A2 C24A1 C24A2 C25A1 C25A2 C27A1 C27A2 C28A1 C28A2 C29A1 C29A2 C30A3 C30A4 C31 C33 C34 C35 C36 C38A6 C38A7 C40A6 C40A7 C41A6 C41A7 C42A6 C42A7 C44A6 C44A7 C45A6 C45A7 C46A6 C46A7 C47A6 C47A7 C48A6 C48A7 C49A6 C49A7 C50A6 C50A7 C51 C52 C53 C54 C55 C56 C57 C58 C59 C60 C61 C63 C64 C65 C66 C68 C70 C71 C72 C73 C74 C75 C76 C77 C78 C79 C80 C81 C82 C83 C84 C85 C86 C87 C88 C89 C91 C92 C94 C95 C96 C97 C98: library part Capacitor, Manufacturer=Murata
  C3 C4 C6 C7 C8 C9 C10 C11 C13 C15 C16 C17 C22 C23A1 C23A2 C25A1 C25A2 C28A1 C28A2 C29A1 C29A2 C30A3 C30A4 C31 C33 C34 C35 C36 C38A6 C38A7 C40A6 C40A7 C41A6 C41A7 C44A6 C44A7 C47A6 C47A7 C48A6 C48A7 C49A6 C49A7 C50A6 C50A7 C52 C53 C56 C57 C58 C59 C60 C61 C63 C64 C65 C66 C68 C70 C71 C72 C73 C74 C75 C76 C77 C78 C79 C80 C81 C83 C84 C85 C86 C87 C88 C89 C92 C94 C96 C97 C98: Model=GRM188R71H104KA93D
  C5 C12 C14: Model=GRM188R61H225KE11D
  C19 C20: Model=GRM1885C1H180FA01D
  C24A1 C24A2 C27A1 C27A2: Model=GRM1885C1H100JA01D
  C42A6 C42A7 C54 C82: Model=GRM1885C1H101JA01D
  C45A6 C45A7 C91: Model=GRM219R71H334KA88D
  C46A6 C46A7 C51 C55 C95: Model=GRM188R61H105KAALD
C18 C21 C62 C67 C69: library part Capacitor, Manufacturer=Yageo
  C18 C21 C67 C69: Model=CC0603CRNPO9BN8R0
  C62: Model=CC1206KKX7RDBB102
DA1: library part TMR3, Manufacturer="Traco Power", Model="TMR 3-2411"
DA2: library part KFXXBD-TR, Manufacturer=STMicroelectronics, Model=KF33BD-TR
DA3A1 DA3A2 DD5 DD14: Manufacturer="Analog Devices"
  DA3A1 DA3A2: Model=ADA4817-1ARDZ
  DD5: Model=ADM3054BRWZ
  DD14: Model=ADM101EARM
DA4A1 DA4A2: library part AD8611, Manufacturer="Analog Devices", Model=AD8611ARM-REEL
DA5 DA7A6 DA7A7: library part TME, Manufacturer="Traco Power"
  DA5: Model="TME 2405S"
  DA7A6 DA7A7: Model="TME 2412S"
DA6A6 DA6A7 DA8A6 DA8A7 DA10A6 DA10A7 DA11 DA12 DA14 DA15: library part LMC7101, Manufacturer="Texas Instruments", Model=LMC7101BIM5
DA9A6 DA9A7: library part LD2981ABU50TR, Manufacturer=STMicroelectronics, Model=L78L05ABUTR
DA13: library part TPD4S009, Manufacturer="Texas Instruments", Model=TPD4S009DBVR
DA16: library part TMR4, Manufacturer="Traco Power", Model="TMR 4-2415"
DA17: library part L78M, Manufacturer=STMicroelectronics, Model=L78M05CDT-TR
DA18: library part LM7301IM5, Manufacturer="Texas Instruments", Model=LM7301IM5X/NOPB
DD1: library part STM32F405VG, Manufacturer=STMicroelectronics, Model=STM32F405VGT6
DD2: library part W25Q, Manufacturer=Winbond, Model=W25Q16JVSNIQ
DD3: library part SN74LVC1G00, Manufacturer="Texas Instruments", Model=SN74LVC1G00DBV
DD4: library part ADUM1301, Manufacturer="Analog Devices", Model=ADUM1301CRW
DD6A6 DD6A7 DD9 DD10: library part SN74LVC1G08, Manufacturer="Texas Instruments", Model=SN74LVC1G08DBV
DD7A6 DD7A7: library part ADUM1401, Manufacturer="Analog Devices", Model=ADUM1401CRW
DD8: library part SN74LVC1G17, Manufacturer="Texas Instruments", Model=SN74LVC1G17DBV
DD11: library part SN74LVC1G10, Manufacturer="Texas Instruments", Model=SN74LVC1G10DBV
DD12: library part SN74LVC1G79, Manufacturer="Texas Instruments", Model=SN74LVC1G79DBV
DD13: library part W5100S, Manufacturer=Wiznet, Model=W5100S-L
DD15: library part ADUM1201, Manufacturer="Analog Devices", Model=ADUM1201CR
DD16: library part ADUM1400, Manufacturer="Analog Devices", Model=ADUM1400CRW
DD17: library part ADUM1100, Manufacturer="Analog Devices", Model=ADUM1100BR
GB1: library part Accumulator, Manufacturer=Connfly, Model=DS1092-12-N8S
L1 L2 L3 L4 L5 L6 L7: library part Inductor, Manufacturer=Murata, Model=BLM21PG221SN1D
R1 R2 R3 R4 R5 R6 R7A1 R7A2 R8A1 R8A2 R9A1 R9A2 R10A1 R10A2 R11A1 R11A2 R13A1 R13A2 R14A1 R14A2 R15A3 R15A4 R16A3 R16A4 R17 R18 R19 R20 R21A6 R21A7 R22A6 R22A7 R23A6 R23A7 R24A6 R24A7 R25A6 R25A7 R26A6 R26A7 R27A6 R27A7 R28A6 R28A7 R29 R30 R31 R32 R33 R34 R35 R36 R37 R38 R39 R40 R41 R42 R43 R44 R45 R46 R47 R48 R49 R50 R51 R52 R53 R54 R55 R56 R57 R58 R59 R60 R61 R62 R63 R64 R65 R66 R67 R68 R69 R70 R71 R72 R73 R74 R75 R76 R77 R78 R79 R80 R81 R82 R83 R84 R85 R86 R87 R88 R89 R90 R91 R92 R93 R94: library part Resistor, Manufacturer=Yageo
  R1 R2 R88: Model=RC0805FR-070RL
  R3 R4 R9A1 R9A2 R11A1 R11A2 R13A1 R13A2 R14A1 R14A2 R15A3 R15A4 R16A3 R16A4 R17 R19 R20 R22A6 R22A7 R25A6 R25A7 R26A6 R26A7 R28A6 R28A7 R29 R31 R33 R34 R40 R55 R56 R57 R58 R59 R60 R62 R63 R64 R65 R66 R67 R68 R73 R74 R76 R78 R79 R80 R82 R87 R89 R90 R91 R93 R94: Model=RC0603FR-0710KL
  R5 R6 R32 R36 R37 R38 R83 R84 R85 R86: Model=RC0603FR-07200RL
  R7A1 R7A2 R8A1 R8A2: Model=RC0805FR-071ML
  R10A1 R10A2 R21A6 R21A7: Model=RC0603FR-075K1L
  R18: Model=RC0805FR-07120RL
  R23A6 R23A7 R75: Model=RC0603FR-07330RL
  R24A6 R24A7 R27A6 R27A7 R77 R81: Model=RC0603FR-07150KL
  R30: Model=RC0603FR-0722KL
  R35: Model=RC1210FR-0710RL
  R39 R47 R50: Model=RC0603FR-071KL
  R41 R42 R43 R44: Model=RC0603FR-0749R9L
  R45 R46 R48 R49: Model=RC0603FR-073R3L
  R51: Model=RC0603FR-07300RL
  R52: Model=RC0603FR-071ML
  R53: Model=RC0603FR-0712KL
  R54: Model=RC0603JR-070RL
  R61: Model=RC0603FR-0720KL
  R69 R70 R71 R72: Model=RC0603FR-07390RL
  R92: Model=RC0603FR-076K04L
R12A1 R12A2: library part Resistor_Variable, Manufacturer=Bourns, Model=3224W-1-204E
U1A6 U1A7 U6: library part HCNR200, Manufacturer=Avago, Model=HCNR-200-500E
U2 U3 U4: library part TLP291, Manufacturer=Toshiba, Model=TLP291(GB-TP,SE
U5 U7: Manufacturer=Toshiba, Model=TLP281-4
VD1 VD2: library part LED, Manufacturer=Kingbright
  VD1: Model=KP-2012MGC
  VD2: Model=KP-2012EC
VD3 VD4 VD5 VD6: library part Diode_Zener, Manufacturer=Nexperia, Model=BZX384-C5V1
VT1: library part "MOSFET N-channel", Manufacturer=UMW, Model=AO3400A
XP1 XP4 XP5A6 XP5A7 XP7: library part Connector-8, Manufacturer=JST, Model=B8B-PHDSS
XP2 XP6 XP8: library part Connector-2, Manufacturer=JST
  XP2: Model=B2P-VH
  XP6 XP8: Model=B2B-EH-A
XP3: library part Connector-6, Manufacturer=Connfly, Model=PLD-6
XP9: library part Connector-24, Manufacturer=JST, Model=B24B-PHDSS
XS1: Manufacturer=LINK-PP, Model=LPJD0012BENL
ZQ1: library part Quartz_Resonator_4-pin, Manufacturer=NDK, Model=NX2520SA-16MHZ-STD-CSW-5
ZQ2: library part Quartz_Resonator, Manufacturer=NDK, Model="NX3215SA- 32.768K-STD-MUA-8"
ZQ3: library part Quartz_Resonator_4-pin, Manufacturer=TXC, Model=7M-25.000MAAJ-T

## Free pads (board coordinates)
  round 6 hole 3.2: ""(5,5) ""(5,50) ""(100,5) ""(100,50) ""(195,5) ""(195,50)

## Via types
v1: diameter 0.6, hole 0.3, Top Layer to Bottom Layer, tented both sides, 714 vias

## Nets (pads, with @x,y where several pads share a name; then routed paths per layer and width w, separated by ;. In a path a pad name is that pad's centre, name@x,y a point inside that pad or via, vN(x,y) a via of type N, cw(c..) or ccw(c..) an arc to the next point about the centre after c; other vN are vias at no path point)
1V2A: C71.1 DD13.4 L4.2 | length 5.7
  Top Layer w0.3: DD13.4@173.3,36.2 v1(175.6,36.2)
  Bottom Layer w0.3: C71.1@173.95,34.3 173.95,35.95 L4.2@174.2,36.2 v1(175.6,36.2)
1V2D: C70.1 C74.1 C76.1 C77.1 DD13.13 DD13.22 DD13.31 DD13.45 L3.2 L4.1 | length 40.4
  Top Layer w0.3: v1(163.208,37) 163.408,37.2 DD13.31@165.2,37.2 ; DD13.22@167.5,41.5 167.5,42.3 v1(167.5,43.1) ; v1(169.821,31.559) 169.901,31.559 170.5,32.158 DD13.45@170.5,33.4 ; DD13.13@172,41.5 172,42 v1(173,42)
  Bottom Layer w0.3: v1(163.208,37) 164.22,37 C77.1@164.27,37.05 ; C74.1@167.5,42.11 C70.1@168.85,42.11 168.905,42.055 172.945,42.055 v1(173,42) 174.205,42 174.665,41.54 174.665,39.511 174.139,38.985 173.885,38.985 L3.2@173.4,38.5 172.376,38.5 172.2,38.324 L4.1@172.2,36.2 ; v1(167.5,43.1) 167.5,42.26 C74.1@167.35,42.11 166.31,42.11 164.27,40.07 164.27,37.2 C77.1@164.27,37.05 ; v1(169.821,31.559) 169.821,32.291 C76.1@169.85,32.32 167.03,32.32 164.27,35.08 C77.1@164.27,37.05
1V2O: C66.1 DD13.14 L3.1 | length 4.7
  Top Layer w0.3: v1(171.5,39.7) DD13.14@171.5,41.5
  Bottom Layer w0.3: v1(171.5,39.7) 171.577,39.777 171.577,40.577 C66.1@171.8,40.8 173.1,40.8 L3.1@173.4,40.5